# Altium PCB riglab_dynamic_scales_wifi_3ch .PcbDoc (part 3 of 3)
Units mm, origin at the board's own origin, x right, y up, seen from the top; angles counter-clockwise.
Board outline 130 x 80 mm, 4 copper layers (Top Layer, POWER, GND, Bottom Layer 1), stack 1.729 mm thick; 252 components, 202 nets, 899 pads, 104 vias.
Unrouted connection lines stored in the file: 235.
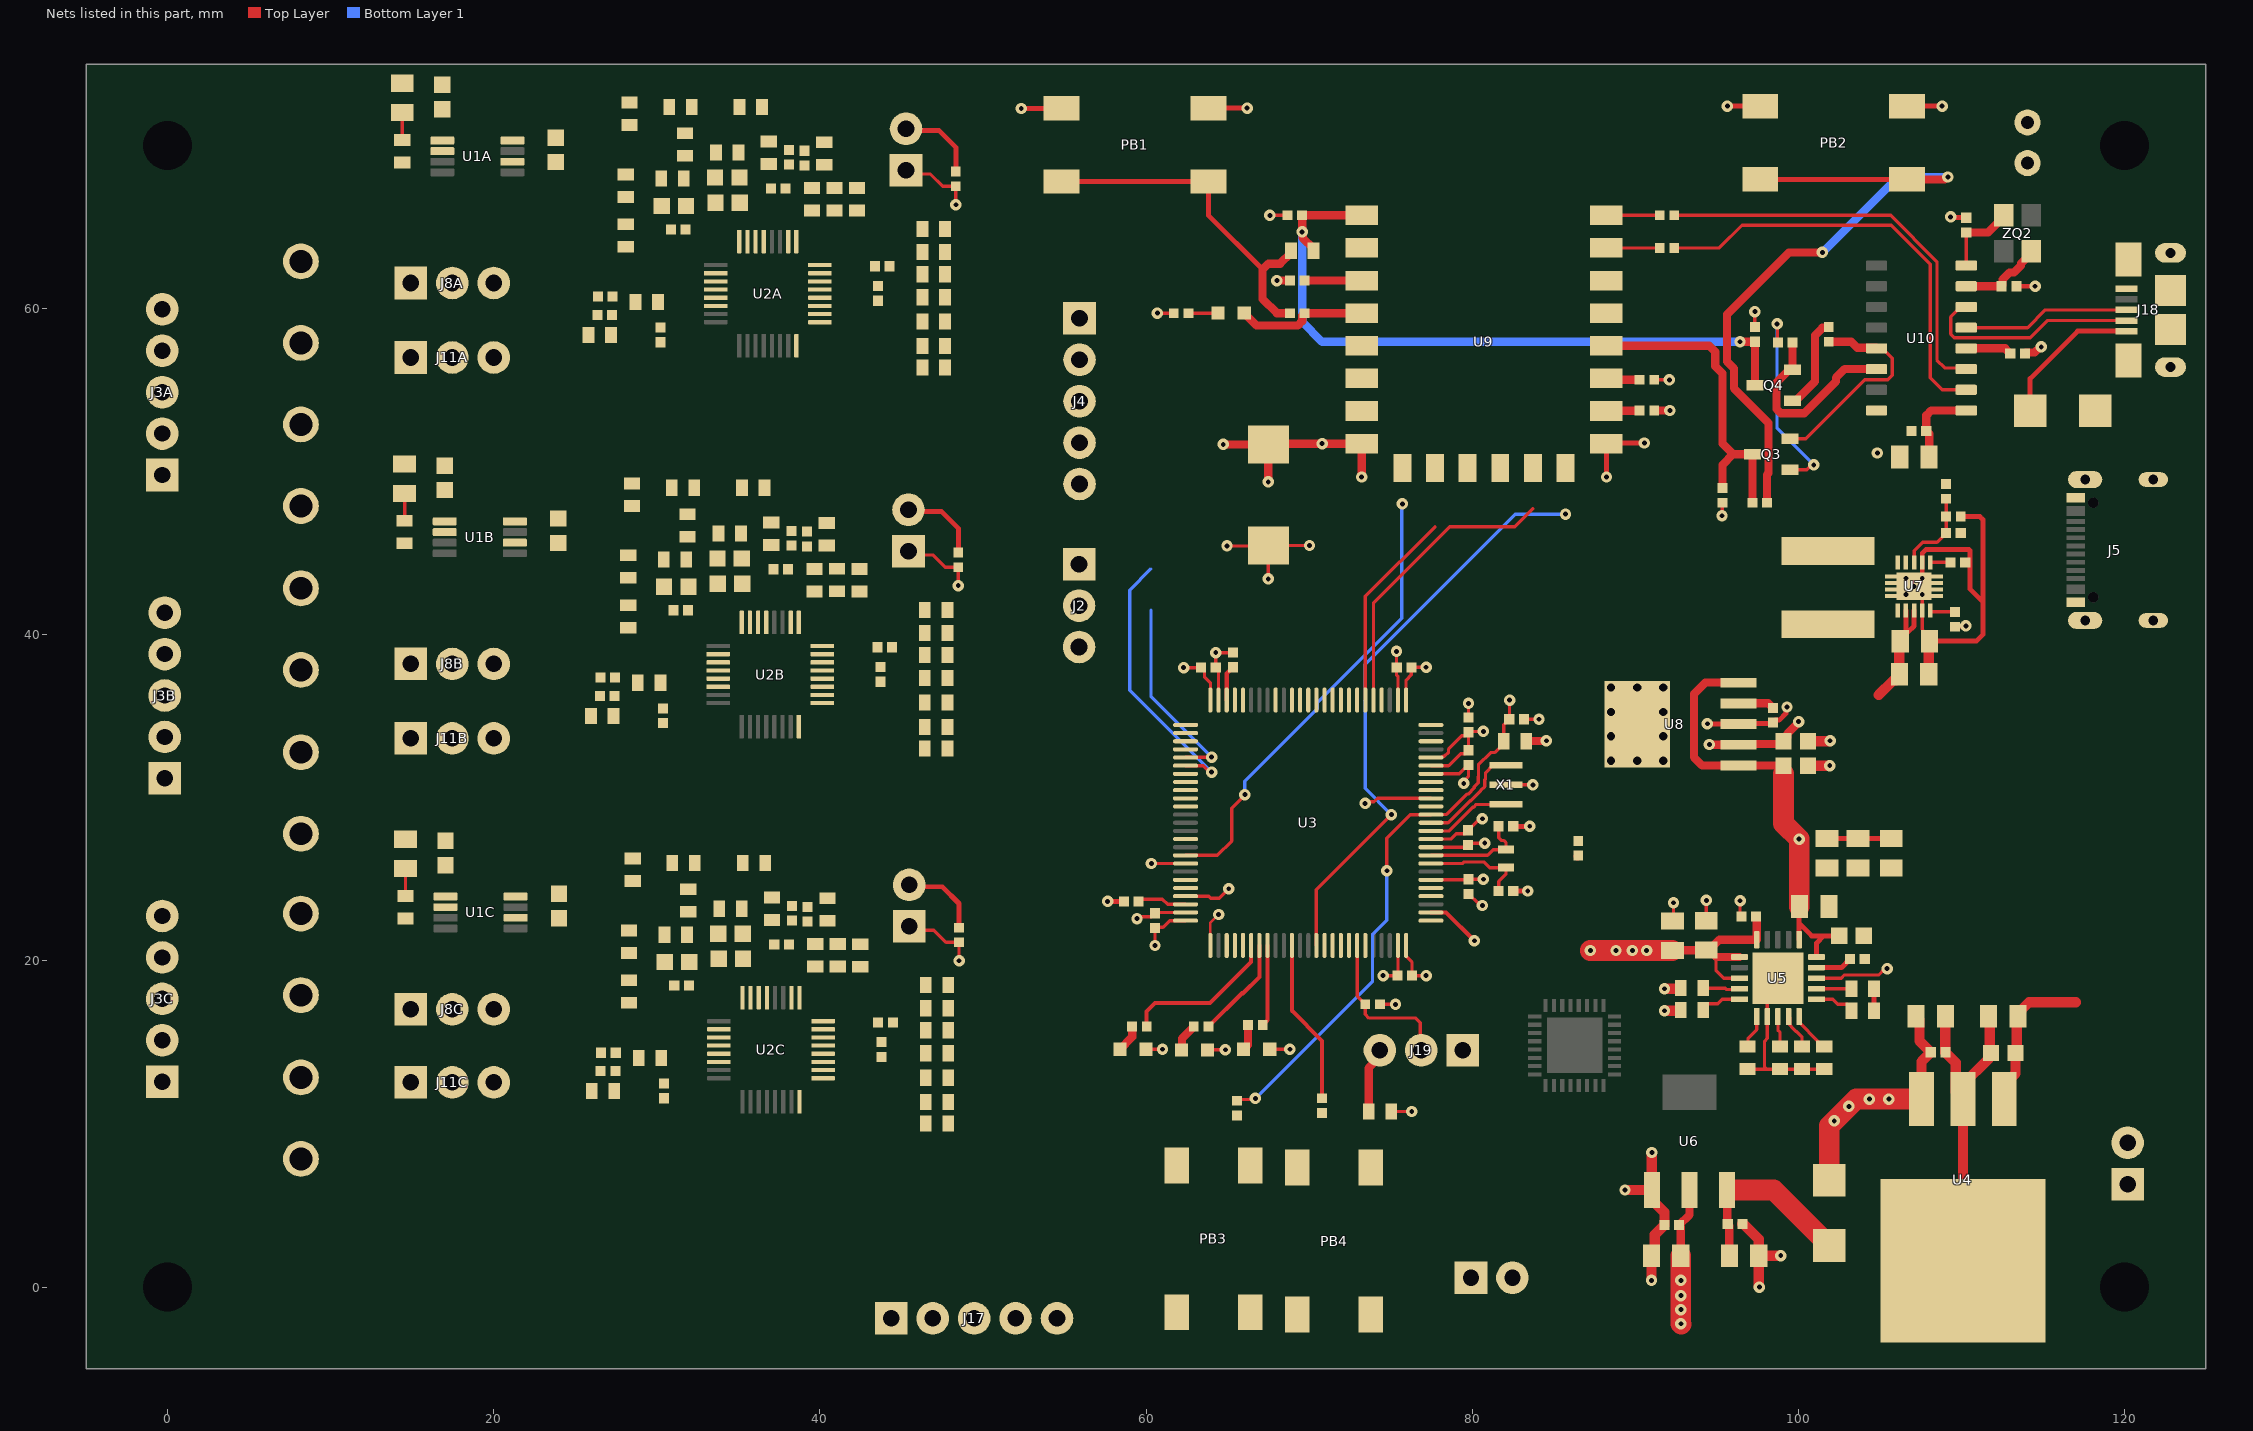
[diagram p4: the nets of this part, all layers, seen from the top]

## Part data (continued)
R1A R1B R1C R2A R2B R2C R3A R3B R3C R4A R4B R4C R5A R5B R5C R14A R14B R14C R16A R16B R16C R17A R17B R17C R32 R33 R34 R35 R36 R38 R41 R42 R46A R46B R46C R74: library part RC0603JR-070RL, "RES 0603 0 5%", Limit Voltage=50V, Manufacturer=Yageo, Temperature Coefficient=100ppm, Tolerance=5%, Total Power Dissipation=0.063W, Working Temperature Max=+155°С, Working Temperature Min=-55°С, Application Category=1, Author="Arshanitsa D.", CreateDate=28.06.2020, Datasheet URL=#https://static.chipdip.ru/lib/788/DOC004788200.pdf#, Device=0603, ID=25, Library Path 2=Resistors.SchLib, Library Ref 2=Resistor2, Library Ref 3=Resistor3, Manufacturer Part Number=RC0603JR-070RL, Material=Thick-Film, Packaging Type="Cut Tape", Part Number=RC0603JR-070RL, Price=0, Price2=0, Price3=0, Series=RC, SMD=Yes, Status=Active, Table="Resistor SMT - Постоянные", Type=Resistor
R6A R6B R6C R8A R8B R8C R9A R9B R9C R10A R10B R10C R11A R11B R11C R12A R12B R12C R13A R13B R13C R15A R15B R15C: library part RC0603JR-0724RL, "RES 0603 24 5%", Limit Voltage=75V, Manufacturer=Yageo, Temperature Coefficient=100ppm, Tolerance=5%, Total Power Dissipation=0.1W, Working Temperature Max=+155°С, Working Temperature Min=-55°С, Application Category=1, Author="Krepak V.", CreateDate=06.07.2020, Datasheet URL=#https://www.terraelectronica.ru/pdf/show?pdf_file=%252Fds%252Fpdf%252FR%252FRC0603%255B1%255D.pdf#, Device=0603, Distributor=terraelectronica, DistributorURL=#https://www.terraelectronica.ru/product/439264#, ID=40, Library Path 2=Resistors.SchLib, Library Ref 2=Resistor2, Library Ref 3=Resistor3, Manufacturer Part Number=RC0603JR-0724RL, Material=Thick-Film, Packaging Type="Cut Tape", Part Number=RC0603JR-0724RL, Price=0, Price2=0, Price3=0, Replacement=CR0603-JW-240ELF, Series=RC, SMD=Yes, Status=Active, Table="Resistor SMT - Постоянные", Type=Resistor
R19A R19B R19C: library part CRCW06033R00JNEA, "RES 0603 3 Ohm 5%", Limit Voltage=75V, Manufacturer="Vishay Dale", Supplier Part Number 1=541-3.0GTR-ND, Temperature Coefficient=100ppm, Tolerance=5%, Total Power Dissipation=0.1W, Working Temperature Max=+155°С, Working Temperature Min=-55°С, Application Category=1, Author="Krepak V.", CreateDate=21.05.2021, Datasheet URL=#https://www.vishay.com/docs/20035/dcrcwe3.pdf#, Device=0603, ID=76, Library Path 2=Resistors.SchLib, Library Ref 2=Resistor2, Library Ref 3=Resistor3, Manufacturer Part Number=CRCW06033R00JNEA, Material=Thick-Film, Packaging Type=Tape&Reel, Part Number=CRCW06033R00JNEA, Price=0, Price2=0, Price3=0, Series=CRCW, SMD=Yes, Status=Active, Supplier 1=Digikey, Table="Resistor SMT - Постоянные", Type=Resistor
R22A R22B R22C R23A R23B R23C R44A R44B R44C: library part RC0603BR-074K12L, "RES 0603 4.12k 0.1%", Limit Voltage=75V, Manufacturer=Yageo, Temperature Coefficient=100ppm, Tolerance=0.1%, Total Power Dissipation=0.1W, Working Temperature Max=+155°С, Working Temperature Min=-55°С, Application Category=1, Author="Krepak V.", CreateDate=09.04.2024, Datasheet URL=#https://www.terraelectronica.ru/pdf/show?pdf_file=https%253A%252F%252Fwww.mouser.com%252Fds%252F2%252F447%252FRC0603-1212058.pdf#, Device=0603, Distributor=terraelectronica, DistributorURL=#https://www.terraelectronica.ru/product/871213#, ID=110, Library Path 2=Resistors.SchLib, Library Ref 2=Resistor2, Library Ref 3=Resistor3, Manufacturer Part Number=RC0603BR-074K12L, Material=Thick-Film, Packaging Type="Cut Tape", Part Number=RC0603BR-074K12L, Price=0, Price2=0, Price3=0, Series=RC, SMD=Yes, Status=Active, Table="Resistor SMT - Постоянные", Type=Resistor
R26 R28: library part RC0603JR-074K7L, "RES 0603 4.7k 5%", Limit Voltage=75V, Manufacturer=Yageo, Temperature Coefficient=100ppm, Tolerance=5%, Total Power Dissipation=0.1W, Working Temperature Max=+155°С, Working Temperature Min=-55°С, Application Category=1, Author="Krepak V.", CreateDate=06.07.2020, Datasheet URL=#https://www.terraelectronica.ru/pdf/show?pdf_file=%252Fds%252Fpdf%252FR%252FRC0603%255B1%255D.pdf#, Device=0603, Distributor=terraelectronica, DistributorURL=#https://www.terraelectronica.ru/product/540975#, ID=29, Library Path 2=Resistors.SchLib, Library Ref 2=Resistor2, Library Ref 3=Resistor3, Manufacturer Part Number=RC0603JR-074K7L, Material=Thick-Film, Packaging Type="Cut Tape", Part Number=RC0603JR-074K7L, Price=0, Price2=0, Price3=0, Replacement="CR-03JL7---4K7, CRCW06034K70JNEA", Series=RC, SMD=Yes, Status=Active, Table="Resistor SMT - Постоянные", Type=Resistor
R27 R29 R30 R64 R65 R66 R68 R69 R72 R73 R75: library part RC0402FR-07499RL, "RES 0402 499 1%", Limit Voltage=50V, Manufacturer=Yageo, Supplier Part Number 1=311-499LRTR-ND, Temperature Coefficient=100ppm, Tolerance=1%, Total Power Dissipation=0.0625W, Working Temperature Max=+155°С, Working Temperature Min=-55°С, Application Category=1, Author="Krepak V.", CreateDate=01.02.2022, Datasheet URL=#https://www.yageo.com/upload/media/product/productsearch/datasheet/rchip/PYu-RC_Group_51_RoHS_L_11.pdf#, Device=0402, Distributor2="Jul. 7, 2020 V.11", ID=90, Library Path 2=Resistors.SchLib, Library Ref 2=Resistor2, Library Ref 3=Resistor3, Manufacturer Part Number=RC0402FR-07499RL, Material=Thick-Film, Packaging Type=Tape&Reel, Part Number=RC0402FR-07499RL, Price=0, Price2=0, Price3=0, Series=RC_L, SMD=Yes, Status=Active, Supplier 1=Digikey, Table="Resistor SMT - Постоянные", Type=Resistor
R31 R39: library part RC0402FR-07100KL, "RES 0402 100k 1%", Limit Voltage=50V, Manufacturer=Yageo, Temperature Coefficient=100ppm, Tolerance=1%, Total Power Dissipation=0.0625W, Working Temperature Max=+155°С, Working Temperature Min=-55°С, Application Category=1, Author="Krepak V.", CreateDate=23.02.2020, Device=0402, ID=2, Library Path 2=Resistors.SchLib, Library Ref 2=Resistor2, Library Ref 3=Resistor3, Material=Thick-Film, Packaging Type="Cut Tape", Part Number=RC0402FR-07100KL, Price=0, Price2=0, Price3=0, Series=RC, SMD=Yes, Table="Resistor SMT - Постоянные", Type=Resistor
R37: library part RC0402FR-07698KL, "RES 0402 698k 1%", Limit Voltage=50V, Manufacturer=Yageo, Temperature Coefficient=100ppm, Tolerance=1%, Total Power Dissipation=0.0625W, Working Temperature Max=+155°С, Working Temperature Min=-55°С, Application Category=1, Author="Krepak V.", CreateDate=09.04.2024, Device=0402, ID=109, Library Path 2=Resistors.SchLib, Library Ref 2=Resistor2, Library Ref 3=Resistor3, Manufacturer Part Number=RC0402FR-07698KL, Material=Thick-Film, Packaging Type="Cut Tape", Part Number=RC0402FR-07698KL, Price=0, Price2=0, Price3=0, Series=RC, SMD=Yes, Status=Active, Table="Resistor SMT - Постоянные", Type=Resistor
R40: library part RC0402FR-0769K8L, "RES 0402 69.8k 1%", Limit Voltage=75V, Manufacturer=Yageo, Temperature Coefficient=100ppm, Tolerance=1%, Total Power Dissipation=0.0625W, Working Temperature Max=+155°С, Working Temperature Min=-55°С, Application Category=1, Author="Krepak V.", CreateDate=22.02.2024, Device=0402, ID=107, Library Path 2=Resistors.SchLib, Library Ref 2=Resistor2, Library Ref 3=Resistor3, Manufacturer Part Number=RC0402FR-0769K8L, Material=Thick-Film, Packaging Type=Tape&Reel, Part Number=RC0402FR-0769K8L, Price=0, Price2=0, Price3=0, Series=0.0625W, SMD=Yes, Status=Active, Table="Resistor SMT - Постоянные", Type=Resistor
R52A R52B R52C R53A R53B R53C: library part RC0603FR-071M2L, "RES 0603 1.2M 1%", Limit Voltage=75V, Manufacturer=Yageo, Temperature Coefficient=100ppm, Tolerance=1%, Total Power Dissipation=0.1W, Working Temperature Max=+155°С, Working Temperature Min=-55°С, Application Category=1, Author="Krepak V.", CreateDate=28.03.2023, Device=0603, ID=97, Library Path 2=Resistors.SchLib, Library Ref 2=Resistor2, Library Ref 3=Resistor3, Manufacturer Part Number=RC0603FR-071M2L, Material=Thick-Film, Packaging Type="Cut Tape", Part Number=RC0603FR-071M2L, Price=0, Price2=0, Price3=0, Series=RC, SMD=Yes, Status=Active, Table="Resistor SMT - Постоянные", Type=Resistor
R54A R54B R54C: library part RC0402FR-07392KL, "RES 0402 392k 1%", Limit Voltage=50V, Manufacturer=Yageo, Supplier Part Number 1=YAG3144TR-ND, Temperature Coefficient=100ppm, Tolerance=1%, Total Power Dissipation=0.0625W, Working Temperature Max=+155°С, Working Temperature Min=-55°С, Application Category=1, Author="Krepak V.", CreateDate=24.06.2021, Datasheet URL=#https://www.yageo.com/upload/media/product/productsearch/datasheet/rchip/PYu-RC_Group_51_RoHS_L_11.pdf#, Device=0402, Distributor2="Jul. 7, 2020 V.11", ID=84, Library Path 2=Resistors.SchLib, Library Ref 2=Resistor2, Library Ref 3=Resistor3, Manufacturer Part Number=RC0402FR-07392KL, Material=Thick-Film, Packaging Type=Tape&Reel, Part Number=RC0402FR-07392KL, Price=0, Price2=0, Price3=0, Series=RC_L, SMD=Yes, Status=Active, Supplier 1=Digikey, Table="Resistor SMT - Постоянные", Type=Resistor
R60 R61 R62 R63 R67 R70 R71: library part RC0402FR-0710KL, "RES 0402 10k 1%", Limit Voltage=50V, Manufacturer=Yageo, Temperature Coefficient=100ppm, Tolerance=1%, Total Power Dissipation=0.0625W, Working Temperature Max=+155°С, Working Temperature Min=-55°С, Application Category=1, Author="Krepak V.", CreateDate=26.02.2020, Datasheet URL=#https://www.terraelectronica.ru/pdf/show?pdf_file=%252Fds%252Fpdf%252FR%252FRC0402.pdf#, Device=0402, ID=9, Library Path 2=Resistors.SchLib, Library Ref 2=Resistor2, Library Ref 3=Resistor3, Manufacturer Part Number=RC0402FR-0710KL, Material=Thick-Film, Packaging Type="Cut Tape", Part Number=RC0402FR-0710KL, Price=0, Price2=0, Price3=0, Replacement=CR-02FL6---10K, Series=RC, SMD=Yes, Table="Resistor SMT - Постоянные", Type=Resistor
U1A U1B U1C: "Series Voltage Reference IC Fixed 2.5V V ±0.1% 10 mA 8-VSSOP", Input Voltage="2.7V ~ 18V", Manufacturer="Texas Instruments", Output Current="10 mA", Output Voltage (Min/Fixed)=2.5V, Package=None, Tolerance=±0.1%, Working Temperature Max="+125°C (TA)", Working Temperature Min=-40°C, Author="Krepak V.", Availability=Unavailable, CreateDate=04.04.2024, Datasheet URL=#https://www.ti.com/lit/ds/symlink/ref5020.pdf#, Datasheet Version="SBOS410K – JUNE 2007 – REVISED JUNE 2023", Device=REF5025, ID=2, Manufacturer Part Number=REF5025AIDGKR, MP=REF5025AIDGKR, Output Type=Fixed, Packaging Type=Tape&Reel, Part Number=REF5025AIDGKR, Price=0, Price2=0, Price3=0, Status=Active, Table="IC - Разное", Type=IC
U2A U2B U2C: "24 Bit Analog to Digital Converter 12 Input 1 Sigma-Delta 32-TQFP (5x5)", Input Voltage="Analog 2.7V ~ 5.25V Digital 2.7V ~ 3.6V", Manufacturer="Texas Instruments", Package="LQFP-32 Texas Instruments", Working Temperature Max=+125°С, Working Temperature Min=-50°C, Author="Krepak V.", Availability=Unavailable, CreateDate=04.04.2024, Datasheet URL=#https://www.ti.com/lit/gpn/ADS124S08#, Datasheet Version="SBAS660C –AUGUST 2016–REVISED JUNE 2017", Device=ADS124S08IPBSR, Function=ADC, ID=11, Manufacturer Part Number=ADS124S08IPBSR, MF="Texas Instruments", MP=ADS124S08IPBSR, Packaging Type=Tape&Reel, Part Number=ADS124S08IPBSR, Price=0, Price2=0, Price3=0, SMD=Yes, SnapEDA_Link=https://www.snapeda.com/parts/ADS124S08IPBSR/Texas%20Instruments/view-part/584788/?ref=snap, Status=Active, Table="IC - Разное", Type=IC
U3: "ARM® Cortex®-M7 STM32F7 Microcontroller IC 32-Bit Single-Core 216MHz 1MB (1M x 8) FLASH 100-LQFP (14x14)", Manufacturer="ST Microelectronics", Operation Frequency=216MHz, Package="LQFP-100 STMicroelectronics", Working Temperature Max=+85°С, Working Temperature Min=-40°С, Author="Krepak V.", Availability="In Stock", Check_prices=https://www.snapeda.com/parts/STM32F765VGT6TR/STMicroelectronics/view-part/?ref=eda, CreateDate=04.04.2024, Datasheet URL=#https://www.st.com/resource/en/datasheet/stm32f765vg.pdf#, Datasheet Version="August 2023", Device=STM32F765VGT6, Flash="1MB (1M x 8)", I/O Lines=82, ID=12, Manufacturer Part Number=STM32F765VGT6, MF=STMicroelectronics, MP=STM32F765VGT6TR, Packaging Type=Tape&Reel, Part Number=STM32F765VGT6, Price=0, Price2=0, Price3=0, Prog Interface="SWD, JTAG", Purchase-URL=https://pricing.snapeda.com/search?q=STM32F765VGT6TR&ref=eda, Series=STM32F7, SMD=Yes, SnapEDA_Link=https://www.snapeda.com/parts/STM32F765VGT6TR/STMicroelectronics/view-part/?ref=snap, SRAM="512K x 8", Status=Active, Supply Operation="1.7V ~ 3.6V", Table="IC - Микроконтроллеры", Type=IC
U4: library part LM7805S/TR, "TO-263-3 Linear Voltage Regulators (LDO) ROHS", Author="Krepak V.", CreateDate=19.02.2024, Device=LM7805S, ID=44, Part Number=LM7805S/TR, Price=0, Price2=0, Price3=0, SMD=Yes, Status=Active, Table="IC - Преобразователи и модули питания", Type=IC
U5: "1-A, 36-V, low-noise, high-PSRR, low-dropout voltage regulator with enable 20-VQFN -40 to 125", Package="VQFN-20 Texas Instruments", Author="Krepak V.", Availability=Good, CreateDate=05.04.2024, Device=TPS7A4700RGWR, ID=48, MF="Texas Instruments", MP=TPS7A4700RGWR, Part Number=TPS7A4700RGWR, Price=0, Price2=0, Price3=0, Purchase-URL=https://pricing.snapeda.com/search/part/TPS7A4700RGWR/?ref=eda, SMD=Yes, SnapEDA_Link=https://www.snapeda.com/parts/TPS7A4700RGWR/Texas%20Instruments/view-part/424142/?ref=snap, Table="IC - Преобразователи и модули питания", Type=IC
U7: "Buck-boost type Adjustable 2.5V~8V 2A 2.5V~12V DFN-10(3x3) DC-DC Converters ROHS", Input Voltage="2.5 V to 12 V", Manufacturer="Texas Instruments", Operation Frequency="2.4 MHz", Working Temperature Max=+85°C, Working Temperature Min=-40°C, Author="Krepak V.", CreateDate=22.02.2024, Datasheet Version=https://www.ti.com/lit/ds/symlink/tps63060.pdf?HQS=dis-dk-null-digikeymode-dsf-pf-null-wwe&ts=1708584012537&ref_url=https%253A%252F%252Fwww.ti.com%252Fgeneral%252Fdocs%252Fsuppproductinfo.tsp%253FdistId%253D10%2526gotoUrl%253Dhttps%253A%252F%252Fwww.ti.com%252Flit%252Fgpn%252Ftps63060, Device=TPS63060DSCR, Function=Buck-Boost, ID=46, Manufacturer Part Number=TPS63060DSCR, Number of Outputs=1, Packaging Type=Tape&Reel, Part Number=TPS63060DSCR, Price=0, Price2=0, Price3=0, SMD=Yes, Status=Active, Table="IC - Преобразователи и модули питания", Topology=Buck-Boost, Type=IC
U8: "1-A, ultra-low-dropout voltage regulator with reverse current protection & enable 6-SOT-223 -40 to 125", Package=None, Author="Krepak V.", Availability=Unavailable, CreateDate=05.04.2024, Device=TPS73733DCQR, ID=49, MP=TPS73733DCQR, Part Number=TPS73733DCQR, Price=0, Price2=0, Price3=0, SMD=Yes, Table="IC - Преобразователи и модули питания", Type=IC
U9: library part ESP8266MOD, "-90dBm 16dBm ESP8266芯片 板载PCBAntenna 2.4GHz SMD,16x24mm WiFi Modules ROHS", Package=None, Working Temperature Max=+85°С, Working Temperature Min=-40°С, Author="Krepak V.", Availability="Not in stock", Check_prices=https://www.snapeda.com/parts/ESP8266-12E/ESP-12E/AI-Thinker/view-part/?ref=eda, CreateDate=04.04.2024, Device=ESP-12F(ESP8266MOD), ID=10, MF=AI-Thinker, MP=ESP8266-12E/ESP-12E, Part Number=ESP8266MOD, Price=0, Price2=0, Price3=0, RF Family/Standard=WiFi, SMD=Yes, SnapEDA_Link=https://www.snapeda.com/parts/ESP8266-12E/ESP-12E/AI-Thinker/view-part/?ref=snap, Status=Active, Table="Modules - Радиотрансиверы", Type=Misc
U10: "2Mbps Transceiver USB 2.0 SOP-16 USB ICs ROHS", Package=None, Author="Krepak V.", Availability="Not in stock", Check_prices=https://www.snapeda.com/parts/Ch340G/WCH/view-part/?ref=eda, CreateDate=05.04.2024, Device=CH340G, ID=29, MF=WCH, MP=Ch340G, Part Number=CH340G, Price=0, Price2=0, Price3=0, SMD=Yes, SnapEDA_Link=https://www.snapeda.com/parts/Ch340G/WCH/view-part/?ref=snap, Table="IC - Микросхемы интерфейсов", Type=IC
U11: "USB Controller USB 2.0, OTG ULPI Interface 32-QFN (5x5)", Manufacturer="Microchip Technology", Manufacturer_Name=Microchip, Supplier Part Number 1=638-1034-ND, Working Temperature Max=+85°С, Working Temperature Min=-40°С, Author="Krepak V.", Copyright="Copyright (C) 2025 Ultra Librarian. All rights reserved.", CreateDate=01.12.2025, Device=USB3300-EZK, ID=30, Manufacturer Part Number=USB3300-EZK, Manufacturer_Part_Number=USB3300-EZK, Part Number=USB3300-EZK, Price=0, Price2=0, Price3=0, Protocol="USB 2.0, OTG", RefDes=RefDes, SMD=Yes, Status=Active, Supplier 1=Digikey, Supply Operation="3V ~ 3.6V", Table="IC - Микросхемы интерфейсов", Type=IC
X1: "8MHz ±0.5% 33pF SMD3213-3P Ceramic Resonators ROHS", Capacitance=33pF, Case/Package=Ceramic, Frequency=8MHz, Frequency Stability=0.2%, Frequency Tolerance=0.5%, Manufacturer=Murata, Max Operating Temperature=80degC, Min Operating Temperature=-20degC, Package Description="3-Pin Surface Mount Device, Body 3.2 x 1.3 mm, Pitch 1.2 mm", Package Quantity=1, Package Reference=CSTCE_G_A-3, Temperature Coefficient=±0.5%, Working Temperature Max=+125°С, Working Temperature Min=-40°С, Author="Krepak V.", Composition=Ceramic, Contact Plating=Gold, CreateDate=21.02.2024, Datasheet URL=#https://jlcpcb.com/partdetail/MurataElectronics-CSTCE8M00G55R0/C70457#, Datasheet Version=Mar.17,2015, Device=Crystal, Height=0.031inch, ID=10, Lead Free=LeadFree, Length=0.126inch, Load Capacitance=33pF, Manufacturer Part Number=CSTCE8M00G55-R0, Manufacturer URL=http://www.murata.com/, Mount=SurfaceMount, Number of Pins=3, Output Frequency=8MHz, Packaging=TapeandReel, Packaging Type=Tape&Reel, Part Number=CSTCE8M00G55-R0, Price=0, Price2=0, Price3=0, REACH SVHC=NoSVHC, RoHSCompliant=True, Self Resonant Frequency=8MHz, SMD=Yes, Status=Active, Table="Crystal SMT - Кварцевые Резонаторы", Termination=SMD/SMT, Tolerance=0.5%, Type=Crystal, Width=0.051inch
ZQ1: library part ABS05-32.768kHz-T, "32.768kHz 12.5pF ±20ppm SMD1610-2P Crystals ROHS", Load Capacitance=12.5pF, Manufacturer=Abracon, Output Frequency=32.768kHz, Working Temperature Max=+85°С, Working Temperature Min=-40°С, Author="Krepak V.", CreateDate=21.02.2024, Datasheet URL=#https://jlcpcb.com/partdetail/AbraconLlc-ABS05_32_768kHzT/C179633#, Datasheet Version="Revised: 06.03.15", Device=Crystal, ID=9, Manufacturer Part Number=ABS05-32.768kHz-T, Packaging Type=Tape&Reel, Part Number=ABS05-32.768kHz-T, Price=0, Price2=0, Price3=0, SMD=Yes, Status=Active, Table="Crystal SMT - Кварцевые Резонаторы", Type=Crystal
ZQ2: library part "KX-7 16.0 MHz", "Кварцевый резонатор 16.0МГц в корпусе SMD. Размер 3,2х2,5х1,2, Температурный диапазон: -20/+70С Стабильность частоты +/- 30ррm.", Output Frequency=16MHz, Distributor=terraelectronica, DistributorURL=#https://www.terraelectronica.ru/product/165772#, ID=1, Part Number="KX-7 16.0 MHz", Price=0, Price2=0, Price3=0, SMD=Yes, Table="Crystal SMT - Кварцевые Резонаторы", Type=Crystal
U6: Device=AMS1117-3.3, ID=25, Part Number=AMS1117-3.3, Price=0, Price2=0, Price3=0, SMD=Yes, Table="IC - Преобразователи и модули питания", Type=IC

## Free pads (board coordinates)
  round 1.524 hole 3 unplated: 2(0,70) 2(0,0) 2(120,0) 2(120,70)

## Via types
v1: diameter 0.7, hole 0.3, Top Layer to Bottom Layer 1, tented both sides, 102 vias
v2: diameter 0.7, hole 0.3, Top Layer to Bottom Layer 1, 2 vias

## Nets (pads, with @x,y where several pads share a name; then routed paths per layer and width w, separated by ;. In a path a pad name is that pad's centre, name@x,y a point inside that pad or via, vN(x,y) a via of type N, cw(c..) or ccw(c..) an arc to the next point about the centre after c; other vN are vias at no path point)
ADC0_DRDY: R12A.2 U3.65
ADC0_nCS: R9A.1 U3.54
ADC1_DRDY: R12B.2 U3.93
ADC1_nCS: R9B.1 U3.32
ADC2_DRDY: R12C.2 U3.95
ADC2_nCS: R9C.1 U3.33
ADC_CLKA: J12A.2 R15A.1 R54A.2 | length 5
  Top Layer w0.305: J12A.2@45.284,71.03 45.399,70.915 47.314,70.915 48.339,69.89 R54A.2@48.339,68.405
ADC_CLKB: J12B.2 R15B.1 R54B.2 | length 5
  Top Layer w0.305: J12B.2@45.434,47.67 45.549,47.555 47.464,47.555 48.489,46.53 R54B.2@48.489,45.045
ADC_CLKC: J12C.2 R15C.1 R54C.2 | length 5
  Top Layer w0.305: J12C.2@45.48,24.665 45.595,24.55 47.51,24.55 48.535,23.525 R54C.2@48.535,22.04
ADC_DINA: R11A.1 R11B.1 R11C.1 U3.16 | length 4.2
  Top Layer w0.203: v1(73.44,29.664) 73.535,29.759 73.982,29.759 74.197,29.973 U3.16@77.475,29.973
ADC_DOUTA: R13A.1 R13B.1 R13C.1 U3.53
ADC_EXT_CLK_EN: U3.57
ADC_nRST: R6A.1 R6B.1 R6C.1 U3.60
ADC_SCLKA: R10A.1 R10B.1 R10C.1 U3.68 | length 2.1
  Top Layer w0.203: v1(60.333,25.973) U3.68@62.425,25.973
ADC_START_SYNC: R8A.1 R8B.1 R8C.1 U3.61
AIN8A: J3A.4 J9A.2 R22A.1 R52A.1
AIN8B: J3B.4 J9B.2 R22B.1 R52B.1
AIN8C: J3C.4 J9C.2 R22C.1 R52C.1
AIN9A: J3A.3 J10A.1 J11A.3 R23A.1 R53A.2
AIN9B: J3B.3 J10B.1 J11B.3 R23B.1 R53B.2
AIN9C: J3C.3 J10C.1 J11C.3 R23C.1 R53C.2
AVDD: C6A.2 C6B.2 C6C.2 J8A.3 J8B.3 J8C.3 R1A.1 R1B.1 R1C.1 R2A.2 R2B.2 R2C.2 R5A.2 R5B.2 R5C.2 R52A.2 R52B.2 R52C.2
AVDD_ADC: C10A.1 C10B.1 C10C.1 C68.2 C69.2 C70.2 R2A.1 R2B.1 R2C.1 U1A.2 U1B.2 U1C.2 U5.1 U5.3 U5.20 | length 16.4
  Top Layer w0.203: C69.2@94.53,20.667 94.953,20.243 94.953,19.423 95.435,18.942 U5.3@96.395,18.942
  Top Layer w0.508: C70.2@92.28,20.642 92.293,20.654 94.342,20.654 C69.2@94.355,20.667 94.53,20.667 95.165,21.302 U5.20@97.455,21.302 97.455,22.677 C68.2@97.415,22.717 ; C69.2@94.953,20.243 94.955,20.242 U5.1@96.395,20.242
  Top Layer w1.27: v1(87.25,20.642) v1(88.825,20.642) v1(89.825,20.642) v1(90.7,20.642) C70.2@92.28,20.642
BOOT0: J19.2 R31.2 U3.94 | length 9.7
  Top Layer w0.203: U3.94@72.95,20.948 72.95,17.848 R31.2@73.45,17.348 73.45,16.723 73.675,16.498 76.55,16.498 76.825,16.223 76.825,14.579 J19.2@76.885,14.519
COEF_RST: R73.2 U3.86 | length 10.1
  Top Layer w0.254: U3.86@68.95,20.948 68.95,16.949 70.8,15.099 R73.2@70.8,11.575
D_N: J18.2 U10.6 | length 13.1
  Top Layer w0.203: U10.6@110.3,60.105 109.955,60.105 109.343,59.493 109.343,58.445 109.565,58.223 114.223,58.223 115.27,59.27 J18.2@119.634,59.27
D_P: J18.3 U10.5 | length 9.8
  Top Layer w0.203: U10.5@110.3,58.835 114.06,58.835 115.145,59.92 J18.3@119.634,59.92
DBG_ESP_CLK: J4.4 U9.14
DBG_ESP_MISO: J4.3 U9.10
DBG_ESP_MOSI: J4.2 U9.13
DBG_ESP_nCS: J4.1 U9.9
DVDD_3.3V: C73.2 R1A.2 R1B.2 R1C.2 R3A.2 R3B.2 R3C.2 R4A.2 R4B.2 R4C.2 U8.2 | length 6.2
  Top Layer w0.508: v1(94.55,33.275) 94.56,33.265 96.315,33.265 U8.2@96.325,33.255 96.371,33.301 98.926,33.301 C73.2@99.1,33.475 99.346,33.721 99.346,33.944 100.025,34.623 v1(100.025,34.675)
ESP_ADC: U9.2
ESP_CS0: R67.2 U3.67 U9.16 | length 30.3
  Top Layer w0.203: U3.67@62.425,26.473 64.373,26.473 65.25,27.35 65.25,29.362 66.062,30.174 v1(66.062,30.198)
  Top Layer w0.508: U9.16@88.225,53.725 88.24,53.74 90.248,53.74 R67.2@90.263,53.755
  Bottom Layer 1 w0.203: v1(66.062,30.198) 66.062,31.01 70.515,35.463 70.515,35.837 75.685,41.007 75.685,47.985 v1(75.725,48.025)
ESP_EN: R62.2 U9.3 | length 3.4
  Top Layer w0.508: R62.2@69.875,61.725 U9.3@73.225,61.725
ESP_GPIO0: Q3.3 R60.2 R66.2 U9.18 | length 20.1
  Top Layer w0.508: U9.18@88.225,57.725 94.543,57.725 94.917,57.351 94.917,56.465 95.35,56.032 95.35,51.725 96,51.075 ; R60.2@95.35,49 95.35,50.425 96,51.075 ; R66.2@97.187,48.1 97.193,48.107 97.193,51.068 Q3.3@97.2,51.075 96,51.075
ESP_GPIO2: R61.2 U9.17 | length 2.1
  Top Layer w0.508: U9.17@88.225,55.725 88.313,55.637 R61.2@90.263,55.637
ESP_GPIO4: U9.19
ESP_GPIO5: U9.20
ESP_GPIO9: U9.11
ESP_GPIO10: U9.12
ESP_GPIO16: LD4.2 R65.1 U9.4 | length 8
  Top Layer w0.508: LD4.2@66.025,59.725 66.779,58.971 69.313,58.971 69.579,59.237 69.579,59.579 R65.1@69.725,59.725 U9.4@73.225,59.725
ESP_MISO: U3.30 U9.6 | length 18.1
  Top Layer w0.203: U3.30@73.95,35.998 73.95,41.943 78.637,46.63 82.625,46.63 83.725,47.73
ESP_MOSI: U3.31 U9.7 | length 12.4
  Top Layer w0.203: U3.31@73.45,35.998 73.45,42.355 77.725,46.63
ESP_nRST: C61.2 Q4.3 R63.2 R74.1 U9.1 | length 42.6
  Top Layer w0.508: R74.1@70.265,63.555 70.265,63.69 69.612,64.343 69.612,64.672 v1(69.575,64.709) R63.2@69.575,65.725 U9.1@73.225,65.725 ; v1(96.429,57.97) C61.2@97.35,57.97 Q4.3@97.35,55.312
  Bottom Layer 1 w0.508: v1(69.575,64.709) 69.575,59.2 70.805,57.97 v1(96.429,57.97)
ESP_RXD: R69.2 U9.21 | length 3.3
  Top Layer w0.203: U9.21@88.225,63.725 R69.2@91.5,63.725
ESP_SCLK: U3.89 U9.5 | length 35.9
  Top Layer w0.203: U3.89@70.45,20.948 70.45,24.371 v1(75.052,28.973)
  Bottom Layer 1 w0.203: v1(75.052,28.973) 73.45,30.575 73.45,38.201 82.649,47.4 v1(85.725,47.4)
ESP_TXD: R68.2 U9.22 | length 3.3
  Top Layer w0.203: U9.22@88.225,65.725 R68.2@91.5,65.725
GND: C2A.1 C2B.1 C2C.1 C3A.1 C3B.1 C3C.1 C4A.1 C4B.1 C4C.1 C5A.1 C5B.1 C5C.1 C10A.2 C10B.2 C10C.2 C11A.2 C11B.2 C11C.2 C13A.1 C13B.1 C13C.1 C17A.1 C17B.1 C17C.1 C19A.2 C19B.2 C19C.2 C25.1 C26.1 C27.1 C28.1 C29.1 C30.1 C31.1 C32.1 C33.1 C34.1 C35.1 C36.1 C37.1 C38.1 C39.1 C40.1 C41.1 C42.1 C43.1 C44.1 C45.1 C46.1 C47.1 C48.1 C49.1 C50.1 C51.1 C52.1 C53.1 C55A.1 C55B.1 C55C.1 C59A.2 C59B.2 C59C.2 C60.2 C61.1 C62.1 C63.1 C64.1 C65.1 C66.1 C67.1 C68.1 C69.1 C70.1 C71.1 C72.1 C73.1 C74.1 J1.2 J2.1 J3A.1 J3B.1 J3C.1 J4.5 J5.A1_B12 J5.B1_A12 J5.SH1 J5.SH2 J5.SH3 J5.SH4 J6.2 J11A.2 J11B.2 J11C.2 J12A.1 J12B.1 J12C.1 J17.5 J18.0 J18.5 J19.1 LD1.2 LD2.2 LD3.2 LD5.2 PB1.2 PB2.2 PB3.2 PB4.2 R14A.1 R14B.1 R14C.1 R31.1 R32.1 R33.1 R34.1 R35.1 R36.1 R38.1 R40.1 R41.1 R42.1 R53A.1 R53B.1 R53C.1 R54A.1 R54B.1 R54C.1 R67.1 U1A.4 U1B.4 U1C.4 U2A.14 U2A.27 U2A.28 U2B.14 U2B.27 U2B.28 U2C.14 U2C.27 U2C.28 U3.10 U3.19 U3.26 U3.49 U3.74 U3.99 U4.2 U4.4 U5.7 U5.21 U6.1 U7.4 U7.7 U7.11 U8.3 U8.6 U9.15 U10.1 X1.2 | length 164.6
  Top Layer w0.203: J12A.1@45.284,68.49 45.519,68.255 46.784,68.255 47.534,67.505 R54A.1@48.339,67.505 v1(48.339,66.374) ; J12B.1@45.434,45.13 45.669,44.895 46.934,44.895 47.684,44.145 R54B.1@48.489,44.145 v1(48.489,43.014) ; J12C.1@45.48,22.125 45.715,21.89 46.98,21.89 47.73,21.14 R54C.1@48.535,21.14 v1(48.535,20.009) ; v1(59.449,22.598) 59.583,22.598 59.7,22.715 60.342,22.715 C27.1@60.55,22.923 60.6,22.973 U3.74@62.425,22.973 ; LD3.2@59.999,14.583 v1(61.01,14.583) ; LD2.2@63.784,14.551 v1(64.865,14.551) ; U3.49@64.45,35.998 64.45,37.823 C25.1@64.275,37.998 v1(64.275,38.908) C35.1@65.325,38.908 ; v1(64.965,45.45) 67.475,45.45 C60.2@67.5,45.475 ; v1(67.5,43.425) C60.2@67.5,45.475 ; LD1.2@67.59,14.583 v1(68.825,14.583) ; v1(70.025,45.475) C60.2@67.5,45.475 ; R31.1@74.35,17.348 74.354,17.344 75.296,17.344 v1(75.3,17.34) ; v1(74.538,19.098) C26.1@75.412,19.098 75.45,19.137 U3.99@75.45,20.948 ; U3.26@75.95,35.998 75.95,37.213 76.275,37.538 C30.1@76.275,37.998 76.285,38.008 v1(77.175,38.008) ; U3.10@77.475,26.973 79.616,26.973 C29.1@79.754,27.112 79.866,27.223 v1(80.773,27.223) ; U3.19@77.475,31.473 79.225,31.473 C28.1@79.775,32.023 79.775,31.31 79.484,31.019 v1(79.484,30.885) ; C31.1@79.774,24.112 80.393,23.493 80.53,23.493 v1(80.625,23.397) ; C32.1@79.775,34.923 v1(79.775,35.795) ; X1.2@82.075,30.798 v1(83.725,30.798) ; C33.1@83.175,34.823 v1(84.1,34.823) ; C70.1@92.28,22.442 92.352,22.513 v1(92.352,23.567) ; C69.1@94.355,22.467 94.367,22.479 v1(94.367,23.717) ; v1(96.43,23.692) 96.43,22.802 C68.1@96.515,22.717 ; R38.1@96.877,13.367 98.054,13.367 ; v1(97.337,59.818) 97.337,58.883 C61.1@97.35,58.87 ; U5.21@98.755,18.942 98.105,18.292 U5.7@98.105,16.582 98.105,15.251 97.935,15.081 97.935,13.486 98.054,13.367 ; R34.1@101.598,13.367 R35.1@100.225,13.367 R36.1@98.882,13.367 98.054,13.367 ; U7.11@107.604,42.47 U7.4@107.604,41.495 107.604,40.326 107.634,40.296 107.634,40.207 108.022,39.82 108.104,39.82 C49.1@108.104,39.609
  Top Layer w0.305: v1(52.35,72.275) 54.8,72.275 PB1.2@54.825,72.3 ; v1(57.65,23.652) C34.1@58.65,23.652 ; PB1.2@63.825,72.3 v1(66.204,72.3) ; C37.1@82.525,24.29 v1(83.413,24.29) ; C36.1@82.525,28.258 v1(83.535,28.258) ; v1(88.24,49.675) 88.24,51.71 U9.15@88.225,51.725 88.26,51.76 v1(90.563,51.76) ; v1(94.425,34.548) 94.437,34.537 96.313,34.537 U8.3@96.325,34.525 96.369,34.569 98.406,34.569 C74.1@98.45,34.613 98.608,34.77 98.826,34.77 99.234,35.179 99.234,35.499 v1(99.31,35.575) ; v1(95.65,72.425) PB2.2@97.667,72.425 ; R33.1@104.645,16.942 R32.1@104.645,18.292 ; PB2.2@106.667,72.425 v1(108.825,72.425) ; U7.11@107.604,43.47 U7.7@107.604,44.445 107.604,45.008 107.818,45.222 110.457,45.222 110.518,45.161 110.518,42.82 111.318,42.02 ; C49.1@108.104,39.609 110.921,39.609 111.318,40.006 111.318,42.02 ; v1(109.343,65.625) 109.368,65.6 110.275,65.6 C65.1@110.3,65.575 ; R40.1@109.966,47.25 111.139,47.25 111.318,47.071 111.318,42.02 ; C66.1@113.375,61.375 v1(114.525,61.375)
  Top Layer w0.508: R67.1@91.163,53.755 v1(92.125,53.755) ; C63.1@108.025,50.91 108.025,52.325 C62.1@107.85,52.5 107.85,53.457 108.148,53.755 U10.1@110.3,53.755 ; C64.1@113.9,57.255 113.956,57.311 114.501,57.311 114.848,57.658 v1(114.9,57.658)
  Top Layer w0.635: v1(89.375,5.95) U6.1@91.025,5.95 ; v1(90.998,0.41) C45.1@90.998,1.925 91.205,2.133 91.205,3.21 C44.1@91.795,3.8 91.795,4.58 91.025,5.35 U6.1@91.025,5.95 ; v1(91.025,8.25) U6.1@91.025,5.95 ; v1(91.795,16.942) 91.807,16.954 92.763,16.954 R41.1@92.79,16.982 ; v1(91.795,18.292) 91.807,18.304 92.764,18.304 R42.1@92.79,18.33 ; C43.1@96.575,3.866 96.644,3.866 97.575,2.935 C42.1@97.575,1.925 ; v1(97.613,0) 97.613,0.018 97.575,0.055 C42.1@97.575,1.925 ; v1(98.925,1.925) C42.1@97.575,1.925 ; C73.1@100.6,33.475 101.907,33.475 101.932,33.5 v1(101.95,33.5) ; C72.1@100.6,31.975 v1(101.932,31.973) ; C50.1@108.004,37.58 C49.1@108.004,39.69 ; C41.1@109.025,16.609 C40.1@109.025,14.4 109.662,13.763 109.662,11.967 U4.2@110.1,11.529 ; U4.4@110.1,1.625 U4.2@110.1,11.529 ; C38.1@111.675,16.61 111.75,16.535 111.75,14.425 C39.1@111.825,14.35 111.642,14.167 111.642,13.966 110.1,12.423 U4.2@110.1,11.529
LED1: R27.1 U3.83 | length 5
  Top Layer w0.254: R27.1@67.156,16.069 67.45,16.363 U3.83@67.45,20.948
LED2: R29.1 U3.82 | length 6.3
  Top Layer w0.254: R29.1@63.834,15.976 65.877,18.018 65.958,18.018 66.95,19.01 U3.82@66.95,20.948
LED3: R30.1 U3.81 | length 9.6
  Top Layer w0.254: R30.1@60.049,15.976 60.04,15.985 60.04,16.898 60.555,17.414 63.928,17.414 66.45,19.935 U3.81@66.45,20.948
LED_OUT: R75.1 U3.2 | length 3.4
  Top Layer w0.254: U3.2@77.475,22.973 77.477,22.971 78.402,22.971 v1(80.136,21.237) ; R75.1@86.498,27.37 R75.1@86.509,27.359
NetC1A_1: C1A.1 C6A.1 R14A.2 R16A.2 U2A.24 | length 0.2
  Top Layer w0.305: R16A.2@36.448,72.375 R16A.2@36.575,72.502
NetC1A_2: C1A.2 U2A.23
NetC1B_1: C1B.1 C6B.1 R14B.2 R16B.2 U2B.24 | length 0.2
  Top Layer w0.305: R16B.2@36.598,49.015 R16B.2@36.725,49.142
NetC1B_2: C1B.2 U2B.23
NetC1C_1: C1C.1 C6C.1 R14C.2 R16C.2 U2C.24 | length 0.2
  Top Layer w0.305: R16C.2@36.643,26.01 R16C.2@36.77,26.137
NetC1C_2: C1C.2 U2C.23
NetC2A_2: C2A.2 R3A.1 U2A.15
NetC2B_2: C2B.2 R3B.1 U2B.15
NetC2C_2: C2C.2 R3C.1 U2C.15
NetC3A_2: C3A.2 R4A.1 U2A.16
NetC3B_2: C3B.2 R4B.1 U2B.16
NetC3C_2: C3C.2 R4C.1 U2C.16
NetC4A_2: C4A.2 C5A.2 R5A.1 U2A.26
NetC4B_2: C4B.2 C5B.2 R5B.1 U2B.26
NetC4C_2: C4C.2 C5C.2 R5C.1 U2C.26
NetC11A_1: C11A.1 U1A.5
NetC11B_1: C11B.1 U1B.5
NetC11C_1: C11C.1 U1C.5
NetC13A_2: C13A.2 R19A.1 | length 1.7
  Top Layer w0.203: R19A.1@14.387,70.351 C13A.2@14.387,72.026
NetC13B_2: C13B.2 R19B.1 | length 1.7
  Top Layer w0.203: R19B.1@14.537,46.991 C13B.2@14.537,48.666
NetC13C_2: C13C.2 R19C.1 | length 1.7
  Top Layer w0.203: R19C.1@14.583,23.986 C13C.2@14.583,25.661
NetC17A_2: C17A.2 C18A.2 R22A.2 U2A.22
NetC17B_2: C17B.2 C18B.2 R22B.2 U2B.22
NetC17C_2: C17C.2 C18C.2 R22C.2 U2C.22
NetC18A_1: C18A.1 C19A.1 R23A.2 U2A.21
NetC18B_1: C18B.1 C19B.1 R23B.2 U2B.21
NetC18C_1: C18C.1 C19C.1 R23C.2 U2C.21
NetC34_2: C34.2 U3.73 | length 3.1
  Top Layer w0.203: C34.2@59.55,23.652 59.688,23.79 61.01,23.79 61.326,23.473 U3.73@62.425,23.473
NetC35_2: C35.2 U3.48 | length 2.2
  Top Layer w0.254: U3.48@64.95,35.998 64.95,37.633 C35.2@65.325,38.008
NetC36_2: C36.2 U3.9 ZQ1.2 | length 6.5
  Top Layer w0.203: U3.9@77.475,26.473 80.945,26.473 81.295,26.823 ZQ1.2@82.075,26.823 82.075,27.266 81.956,27.385 81.802,27.385 81.625,27.562 C36.2@81.625,28.258
NetC37_2: C37.2 U3.8 ZQ1.1 | length 6.4
  Top Layer w0.203: U3.8@77.475,25.973 79.396,25.973 79.484,26.062 80.743,26.062 81.081,25.723 ZQ1.1@82.075,25.723 82.075,25.323 81.625,24.873 C37.2@81.625,24.29
NetC42_2: C42.2 C43.2 D3.2 U6.3 | length 11.7
  Top Layer w0.254: U6.3@95.65,5.925 95.675,5.95 96.125,5.95
  Top Layer w0.508: U6.3@95.65,5.925 95.65,3.891 C43.2@95.675,3.866 95.775,3.766 C42.2@95.775,1.925
  Top Layer w1.27: 96.125,5.95 98.5,5.95 D3.2@101.9,2.55
NetC51_2: C51.2 U7.6 | length 1.3
  Top Layer w0.203: U7.6@108.142,44.395 108.104,44.433 U7.6@108.104,44.445 C51.2@109.344,44.445
NetC52_2: C52.2 R37.1 R40.2 U7.8 | length 5.3
  Top Layer w0.203: U7.8@107.104,44.445 107.119,44.46 107.119,45.165 107.63,45.676 108.509,45.676 C52.2@108.984,46.151 ; R37.1@109.066,48.35 R40.2@109.066,47.25 C52.2@109.066,46.315 ; C52.2@109.066,46.315 C52.2@109.066,46.233 108.984,46.233 C52.2@109.066,46.315
NetC55A_2: C55A.2 C57A.2 R44A.2 U2A.30
NetC55B_2: C55B.2 C57B.2 R44B.2 U2B.30
NetC55C_2: C55C.2 C57C.2 R44C.2 U2C.30
NetC57A_1: C57A.1 C59A.1 R46A.2 U2A.29
NetC57B_1: C57B.1 C59B.1 R46B.2 U2B.29
NetC57C_1: C57C.1 C59C.1 R46C.2 U2C.29
NetC64_2: C64.2 U10.4 | length 2.8
  Top Layer w0.508: U10.4@110.3,57.565 112.69,57.565 C64.2@113,57.255
NetC65_2: C65.2 U10.8 ZQ2.1 | length 4.8
  Top Layer w0.203: U10.8@110.3,62.645 C65.2@110.3,64.675
  Top Layer w0.508: C65.2@110.3,64.675 111.65,64.675 112.6,65.625 ZQ2.1@112.6,65.725
NetC66_2: C66.2 U10.7 ZQ2.3 | length 5.2
  Top Layer w0.508: U10.7@110.3,61.375 C66.2@112.475,61.375 112.531,61.431 112.531,61.793 112.953,62.215 113.232,62.215 113.654,62.637 113.654,62.781 113.952,63.079 113.954,63.079 114.3,63.425 ZQ2.3@114.3,63.525
NetC71_2: C71.2 U5.14 | length 2.3
  Top Layer w0.305: U5.14@101.115,19.592 102.653,19.592 C71.2@103.175,20.114
NetC74_2: C74.2 U8.4 | length 2.2
  Top Layer w0.508: U8.4@96.325,35.795 98.168,35.795 C74.2@98.45,35.513
NetJ19_3: J19.3 R28.1 | length 4
  Top Layer w0.508: R28.1@73.655,10.769 73.655,13.425 74.345,14.115 J19.3@74.345,14.519
NetL1_1: L1.1 U7.1
NetL1_2: L1.2 U7.10
NetLD1_1: LD1.1 R27.2 | length 1.6
  Top Layer w0.508: LD1.1@65.99,14.583 66.256,14.849 R27.2@66.256,16.069
NetLD2_1: LD2.1 R29.2 | length 1.7
  Top Layer w0.508: LD2.1@62.184,14.551 62.203,14.57 62.203,15.245 R29.2@62.934,15.976
NetLD3_1: LD3.1 R30.2 | length 1.7
  Top Layer w0.508: LD3.1@58.399,14.583 59.149,15.333 R30.2@59.149,15.976
NetLD4_1: LD4.1 R64.1 | length 1.8
  Top Layer w0.203: R64.1@62.605,59.725 LD4.1@64.425,59.725
NetLD5_1: LD5.1 R75.2 | length 0.3
  Top Layer w0.508: R75.2@86.463,26.413 R75.2@86.509,26.459 ; LD5.1@113.884,68.749 LD5.1@114.06,68.925
NetPB1_1: PB1.1 R65.2 R74.2 | length 21.9
  Top Layer w0.305: PB1.1@54.825,67.8 PB1.1@63.825,67.8 63.825,65.725 67.15,62.4
  Top Layer w0.508: R65.2@68.825,59.725 68.025,59.725 67.15,60.6 67.15,62.4 67.509,62.759 68.225,62.759 68.885,63.42 R74.2@68.885,63.555
NetPB2_1: PB2.1 R66.1 | length 41.3
  Top Layer w0.305: PB2.1@97.667,67.925 PB2.1@106.667,67.925
  Top Layer w0.508: R66.1@98.087,48.1 98.087,49.821 98.179,49.913 98.179,52.991 96.058,55.112 96.058,56.325 95.625,56.758 95.625,59.657 99.418,63.45 v1(101.479,63.45) ; PB2.1@106.667,67.925 108.973,67.925 109.123,68.075 v1(109.175,68.075)
  Bottom Layer 1 w0.508: v1(101.479,63.45) 106.104,68.075 v1(109.175,68.075)
NetPB3_1: PB3.1 R72.1
NetPB4_1: PB4.1 R73.1
NetQ3_1: Q3.1 R70.2 | length 12.3
  Top Layer w0.203: v1(98.7,59.07) 98.725,59.045 98.725,57.958 R70.2@98.75,57.933 ; Q3.1@99.5,50.125 100.515,50.125 100.815,50.425 v1(100.95,50.425)
  Bottom Layer 1 w0.203: v1(98.7,59.07) 98.7,52.675 v1(100.95,50.425)
NetQ3_2: Q3.2 R71.1 U10.13 | length 13.2
  Top Layer w0.203: Q3.2@99.5,52.025 100.454,52.025 104.065,55.637 105.488,55.637 105.757,55.905 105.757,56.953 105.145,57.565 U10.13@104.8,57.565
  Top Layer w0.508: R71.1@101.867,57.97 103.255,57.97 103.625,57.6 104.765,57.6 U10.13@104.8,57.565
NetQ4_1: Q4.1 R71.2 | length 5.7
  Top Layer w0.508: Q4.1@99.65,54.362 99.85,54.362 101.025,55.537 101.025,58.37 101.479,58.824 101.821,58.824 R71.2@101.867,58.87
NetQ4_2: Q4.2 R70.1 U10.14 | length 12.1
  Top Layer w0.508: R70.1@99.65,57.933 Q4.2@99.65,56.262 99.45,56.262 98.671,55.483 98.671,53.849 98.937,53.583 100.363,53.583 102.317,55.537 102.317,55.765 102.847,56.295 U10.14@104.8,56.295
NetR6A_2: R6A.2 U2A.18
NetR6B_2: R6B.2 U2B.18
NetR6C_2: R6C.2 U2C.18
NetR8A_2: R8A.2 U2A.8
NetR8B_2: R8B.2 U2B.8
NetR8C_2: R8C.2 U2C.8
NetR9A_2: R9A.2 U2A.9
NetR9B_2: R9B.2 U2B.9
NetR9C_2: R9C.2 U2C.9
NetR10A_2: R10A.2 U2A.11
NetR10B_2: R10B.2 U2B.11
NetR10C_2: R10C.2 U2C.11
NetR11A_2: R11A.2 U2A.10
NetR11B_2: R11B.2 U2B.10
NetR11C_2: R11C.2 U2C.10
NetR12A_1: R12A.1 U2A.13
NetR12B_1: R12B.1 U2B.13
NetR12C_1: R12C.1 U2C.13
NetR13A_2: R13A.2 U2A.12
NetR13B_2: R13B.2 U2B.12
NetR13C_2: R13C.2 U2C.12
NetR15A_2: R15A.2 U2A.17
NetR15B_2: R15B.2 U2B.17
NetR15C_2: R15C.2 U2C.17
NetR17A_1: R17A.1 R19A.2 U1A.6
NetR17B_1: R17B.1 R19B.2 U1B.6
NetR17C_1: R17C.1 R19C.2 U1C.6
NetR32_2: R32.2 U5.12 | length 2.1
  Top Layer w0.203: U5.12@101.115,18.292 R32.2@103.265,18.292
NetR33_2: R33.2 U5.11 | length 2.5
  Top Layer w0.203: U5.11@101.115,17.642 102.119,17.642 102.426,17.335 103.007,17.335 103.265,17.077 R33.2@103.265,16.942
NetR34_2: R34.2 U5.10 | length 2.6
  Top Layer w0.203: U5.10@100.055,16.582 100.055,16.227 101.204,15.078 101.204,15.005 101.463,14.747 R34.2@101.598,14.747
NetR35_2: R35.2 U5.9 | length 2.2
  Top Layer w0.203: U5.9@99.405,16.582 99.473,16.513 99.473,16.093 99.583,15.983 99.583,15.957 99.891,15.649 99.918,15.649 100.225,15.342 R35.2@100.225,14.747
NetR36_2: R36.2 U5.8 | length 1.9
  Top Layer w0.203: U5.8@98.755,16.582 98.755,15.742 98.882,15.614 R36.2@98.882,14.747
NetR38_2: R38.2 U5.6 | length 2.1
  Top Layer w0.203: R38.2@96.877,14.747 96.92,14.789 96.92,15.257 97.455,15.792 U5.6@97.455,16.582
NetR39_1: R39.1 U7.5 | length 1.6
  Top Layer w0.203: U7.5@108.104,41.495 108.104,41.445 108.142,41.406 R39.1@109.618,41.406
NetR41_2: R41.2 U5.5 | length 2.6
  Top Layer w0.203: R41.2@94.17,16.982 94.17,17.117 94.428,17.375 95.067,17.375 95.333,17.642 U5.5@96.395,17.642
NetR42_2: R42.2 U5.4 | length 2.3
  Top Layer w0.203: R42.2@94.17,18.33 95.522,18.33 95.605,18.247 96.35,18.247 U5.4@96.395,18.292
NetR68_1: R68.1 U10.3 | length 25.3
  Top Layer w0.203: R68.1@92.4,65.725 105.669,65.725 108.503,62.891 108.503,56.849 108.987,56.366 110.229,56.366 U10.3@110.3,56.295
NetR69_1: R69.1 U10.2 | length 26.7
  Top Layer w0.203: R69.1@92.4,63.725 95.15,63.725 96.55,65.125 105.699,65.125 108.1,62.724 108.1,55.75 108.825,55.025 U10.2@110.3,55.025
NetU3_12: U3.12 X1.3 | length 5.3
  Top Layer w0.203: U3.12@77.475,27.973 78.592,27.973 80.045,29.427 80.088,29.427 80.26,29.598 X1.3@82.075,29.598
NetU3_13: U3.13 X1.1 | length 6.5
  Top Layer w0.203: U3.13@77.475,28.473 78.522,28.473 79.878,29.83 79.921,29.83 80.539,30.448 80.539,30.459 80.773,30.693 80.773,31.123 80.825,31.175 80.825,31.548 81.275,31.998 X1.1@82.075,31.998
NRST: C33.2 J17.1 R26.1 R72.2 U3.14 | length 33.6
  Top Layer w0.203: R72.2@65.583,11.425 65.658,11.5 66.631,11.5 v1(66.706,11.575) ; v1(74.77,25.529) 74.77,27.538 76.205,28.973 U3.14@77.475,28.973 77.484,28.982 78.434,28.982 79.685,30.233 79.754,30.233 80.136,30.615 80.136,30.684 80.37,30.919 80.37,31.29 80.387,31.307 80.387,32.035 81.128,32.777 81.373,32.777 81.935,33.338 R26.1@81.935,33.473 81.935,34.483 C33.2@82.275,34.823 82.295,34.843 v1(82.295,35.998)
  Bottom Layer 1 w0.203: v1(66.706,11.575) 66.738,11.575 73.887,18.723 73.887,21.617 74.77,22.5 v1(74.77,25.529)
QUAD_SPI_BK1_IO0: U3.58
QUAD_SPI_BK1_IO1: U3.59
QUAD_SPI_BK1_IO2: U3.1
QUAD_SPI_BK1_IO3: U3.23
QUAD_SPI_BK1_NCS: U3.92
QUAD_SPI_BK2_IO0: U3.37
QUAD_SPI_BK2_IO1: U3.38
QUAD_SPI_BK2_IO2: U3.39
QUAD_SPI_BK2_IO3: U3.40
QUAD_SPI_BK2_NCS: U3.79
QUAD_SPI_CLK: U3.36
REFN0A: J3A.2 J10A.2 J11A.1 R46A.1
REFN0B: J3B.2 J10B.2 J11B.1 R46B.1
REFN0C: J3C.2 J10C.2 J11C.1 R46C.1
REFP0A: J3A.5 J8A.2 J9A.1 R44A.1
REFP0B: J3B.5 J8B.2 J9B.1 R44B.1
REFP0C: J3C.5 J8C.2 J9C.1 R44C.1
SPI3_MISO: U3.90
SPI3_MOSI: U3.80
SPI3_SCK: U3.78
SPI4_MISO: U3.4
SPI4_MOSI: U3.5
SPI4_SCK: U3.42
STM_RX: J2.2 U3.56 | length 16.8
  Top Layer w0.203: U3.56@62.425,31.973 63.505,31.973 63.901,31.577 v2(64.025,31.577)
  Bottom Layer 1 w0.203: 60.303,44.038 59.002,42.736 59.002,36.601 v2(64.025,31.577)
STM_TX: J2.3 U3.55 | length 12.2
  Top Layer w0.203: U3.55@62.425,32.473 62.434,32.482 64.007,32.482 v2(64.025,32.5)
  Bottom Layer 1 w0.203: 60.303,41.498 60.303,36.222 v2(64.025,32.5)
SWCLK: J17.4 U3.76 | length 2.1
  Top Layer w0.152: U3.76@63.95,20.948 63.95,22.348 v1(64.45,22.848)
SWDIO: J17.3 U3.72 | length 2.9
  Top Layer w0.203: U3.72@62.425,23.973 63.839,23.973 63.964,23.848 64.498,23.848 v1(65.075,24.425)
USB_OTG_FS_DM: U3.70
USB_OTG_FS_DP: U3.71
USB_OTG_HS_ULPI_CK: U3.29
USB_OTG_HS_ULPI_D0: U3.25
USB_OTG_HS_ULPI_D1: U3.34
USB_OTG_HS_ULPI_D2: U3.35
USB_OTG_HS_ULPI_D3: U3.46
USB_OTG_HS_ULPI_D4: U3.47
USB_OTG_HS_ULPI_D5: U3.51
USB_OTG_HS_ULPI_D6: U3.52
USB_OTG_HS_ULPI_D7: U3.91
USB_OTG_HS_ULPI_DIR: U3.17
USB_OTG_HS_ULPI_NXT: U3.18
USB_OTG_HS_ULPI_STP: U3.15
VBAT: C38.2 C39.2 C49.2 C50.2 J1.1 J6.1 U4.1 U7.2 U7.3 | length 17
  Top Layer w0.305: C49.2@106.257,39.609 106.257,39.78 106.63,40.153 106.712,40.153 107.104,40.545 U7.3@107.104,41.495 ; C49.2@106.604,40.153 U7.2@106.604,41.495
  Top Layer w0.635: 104.936,36.313 105.821,37.198 105.996,37.198 106.204,37.405 C50.2@106.204,37.58 C49.2@106.204,39.609 ; U4.1@112.64,11.529 112.64,12.423 113.325,13.108 C39.2@113.325,14.35 113.4,14.425 113.4,16.71 114.15,17.46 117.012,17.46
VBUS: D4.1 J18.1 | length 8.5
  Top Layer w0.305: D4.1@114.225,53.75 114.225,55.708 117.137,58.62 J18.1@119.593,58.62
VCC3V3: C25.2 C26.2 C27.2 C28.2 C29.2 C30.2 C31.2 C32.2 C44.2 C45.2 C60.1 J17.2 R26.2 R28.2 R60.1 R61.1 R62.1 R63.1 R64.2 U3.6 U3.11 U3.20 U3.21 U3.27 U3.50 U3.75 U3.100 U6.2 U9.8 | length 55.5
  Top Layer w0.203: v1(60.55,20.948) C27.2@60.55,22.023 60.594,22.068 61.046,22.068 61.452,22.473 U3.75@62.425,22.473 ; v1(60.7,59.725) R64.2@61.705,59.725 ; v1(62.305,37.985) 63.362,37.985 C25.2@63.375,37.998 63.583,37.79 63.583,37.425 63.95,37.058 U3.50@63.95,35.998 ; v1(67.6,65.725) R63.1@68.675,65.725 ; R28.2@75.035,10.769 v1(76.3,10.769) ; v1(75.362,38.983) 75.362,38.012 C30.2@75.375,37.998 75.362,37.985 75.362,37.538 75.45,37.45 U3.27@75.45,35.998 ; U3.100@75.95,20.948 75.95,20.298 76.312,19.937 C26.2@76.312,19.098 v1(77.175,19.098) ; U3.6@77.475,24.973 79.736,24.973 C31.2@79.774,25.012 v1(80.694,25.012) ; U3.11@77.475,27.473 78.681,27.473 79.011,27.803 79.546,27.803 C29.2@79.754,28.012 80.366,28.623 80.53,28.623 v1(80.625,28.718) ; U3.20@77.475,31.973 78.555,31.973 79.296,32.715 79.567,32.715 C28.2@79.775,32.923 C32.2@79.775,34.023 ; U3.21@77.475,32.473 78.138,32.473 78.211,32.547 78.302,32.547 78.552,32.797 78.552,33 79.367,33.815 79.567,33.815 C32.2@79.751,34 ; C32.2@79.775,34.023 79.827,34.075 v1(80.694,34.075) ; R61.1@91.163,55.637 v1(92.1,55.637) ; v1(95.325,47.3) 95.338,47.312 95.338,48.087 R60.1@95.35,48.1
  Top Layer w0.508: v1(64.735,51.675) C60.1@67.5,51.675 ; v1(67.5,49.375) C60.1@67.5,51.675 ; v1(68.025,61.725) R62.1@68.825,61.725 ; v1(73.225,49.675) U9.8@73.225,51.725 v1(70.805,51.725) 67.55,51.725 C60.1@67.5,51.675 ; R26.2@83.315,33.473 83.328,33.487 84.537,33.487 v1(84.55,33.5) ; C45.2@92.798,1.925 92.798,3.697 C44.2@92.695,3.8 93.325,4.43 U6.2@93.325,5.95
  Top Layer w1.27: C45.2@92.798,1.925 v1(92.798,0.41) v1(92.798,-0.528) v1(92.798,-1.388) v1(92.798,-2.248) v1@92.825,-2.275
VCC5V0: C40.2 C41.2 C62.2 C63.2 D3.1 D4.2 U4.3 U10.16 | length 15.4
  Top Layer w0.635: C41.2@107.225,16.609 107.433,16.402 107.433,15.092 C40.2@108.125,14.4 107.56,13.835 U4.3@107.56,11.529
  Top Layer w1.27: D3.1@101.9,6.55 101.9,9.879 v1(102.208,10.187) v1(103.1,11.079) 103.55,11.529 v1(104.358,11.529) v1(105.555,11.529) U4.3@107.56,11.529
  other v1: 104.85,51.15
VCC5V5_REG: C46.2 C47.2 C48.2 C53.2 C67.2 C72.2 R37.2 R39.2 U5.13 U5.15 U5.16 U7.9 U8.1 U8.5 | length 36.6
  Top Layer w0.203: U5.13@101.115,18.942 102.633,18.942 102.829,19.138 104.928,19.138 105.316,19.525 v1(105.45,19.525)
  Top Layer w0.305: U5.16@100.055,21.302 100.055,22.309 ; C53.2@100.055,23.317 100.055,22.309 ; U5.15@101.115,20.242 101.115,21.086 101.57,21.542 ; C48.2@101.759,27.509 C47.2@103.658,27.509 C46.2@105.7,27.509 ; C67.2@102.517,21.542 101.57,21.542 ; R39.2@109.618,40.5 109.643,40.525 110.254,40.525 v1(110.279,40.55) ; 100.055,22.309 100.823,21.542 101.57,21.542
  Top Layer w0.508: U8.5@96.325,37.065 96.315,37.075 94.3,37.075 93.603,36.378 93.603,32.487 94.105,31.985 U8.1@96.325,31.985 96.33,31.98 C72.2@99.095,31.98
  Top Layer w1.27: 99.1,31.475 99.1,28.428 v1(100.055,27.473) C53.2@100.055,23.317
VREF: J8A.1 J8B.1 J8C.1 R16A.1 R16B.1 R16C.1 R17A.2 R17B.2 R17C.2
pads on no net: J5. J5.A4_B9 J5.A5 J5.A6 J5.A7 J5.A8 J5.B4_A9 J5.B5 J5.B6 J5.B7 J5.B8 J18.4 U1A.1 U1A.3 U1A.7 U1A.8 U1B.1 U1B.3 U1B.7 U1B.8 U1C.1 U1C.3 U1C.7 U1C.8 U2A.1 U2A.2 U2A.3 U2A.4 U2A.5 U2A.6 U2A.7 U2A.19 U2A.20 U2A.25 U2A.31 U2A.32 U2B.1 U2B.2 U2B.3 U2B.4 U2B.5 U2B.6 U2B.7 U2B.19 U2B.20 U2B.25 U2B.31 U2B.32 U2C.1 U2C.2 U2C.3 U2C.4 U2C.5 U2C.6 U2C.7 U2C.19 U2C.20 U2C.25 U2C.31 U2C.32 U3.3 U3.7 U3.22 U3.24 U3.28 U3.41 U3.43 U3.44 U3.45 U3.62 U3.63 U3.64 U3.66 U3.69 U3.77 U3.84 U3.85 U3.87 U3.88 U3.96 U3.97 U3.98 U5.2 U5.17 U5.18 U5.19 U6.4 U10.9 U10.10 U10.11 U10.12 U10.15 U11.1 U11.2 U11.3 U11.4 U11.5 U11.6 U11.7 U11.8 U11.9 U11.10 U11.11 U11.12 U11.13 U11.14 U11.15 U11.16 U11.17 U11.18 U11.19 U11.20 U11.21 U11.22 U11.23 U11.24 U11.25 U11.26 U11.27 U11.28 U11.29 U11.30 U11.31 U11.32 U11.33 ZQ2.2 ZQ2.4

## Polygon pours and split planes (outlines as drawn)
GND on Top Layer "NONET_L01_P003" (solid, shelved, pour order 3): -5,-5 -5,75 125,75 125,-5
NetL1_1 on Top Layer "NONET_L01_P000" (solid, shelved, pour order 0): 112.98,26.487 114.728,24.739 114.728,18.814 110.927,18.814 110.608,19.133 110.608,25.196 111.405,25.993 111.405,26.49
NetL1_2 on Top Layer "NONET_L01_P001" (solid, shelved, pour order 1): 107.98,26.488 106.442,24.95 106.442,18.814 109.854,18.814 110.103,19.064 110.103,25.196 109.305,25.993 109.305,26.49
VCC5V5_REG on Top Layer "NONET_L01_P002" (solid, shelved, pour order 2): 109.305,26.71 108.009,26.71 107.359,26.06 100.917,26.06 99.844,26.06 99.367,26.538 99.367,28.631 100.669,29.934 105.169,29.934 105.169,29.334 105.29,29.212 107.083,29.212 109.305,26.99
VCC3V3 on POWER (split plane): 124.49,-4.49 -4.49,-4.49 -4.49,74.49 124.49,74.49
AVDD_ADC on POWER (split plane): 45.116,56.326 45.116,50.329 43.908,49.121 43.88,49.079 43.871,49.03 43.871,46.72 43.88,46.671 43.908,46.629 49.454,41.083 49.496,41.055 49.545,41.046 57.396,41.046 57.396,39.9 57.405,39.85 57.433,39.808 73.733,23.508 73.775,23.48 73.825,23.471 91.446,23.471 93.808,21.109 93.808,17.191 92.921,16.304 83.804,16.304 79.101,21.007 79.059,21.035 79.009,21.045 74.091,21.045 74.041,21.035 73.999,21.007 71.521,18.529 65.554,18.529 37.379,46.704 37.379,55.446 39.679,57.746 43.696,57.746
VCC5V0 on POWER (split plane): 115.096,51.469 115.096,26.88 109.214,20.999 109.186,20.957 109.176,20.907 109.176,9.698 107.383,7.904 98.954,7.904 98.954,20.521 106.534,28.101 106.562,28.143 106.572,28.192 106.572,51.164 108.879,53.471 113.094,53.471
DVDD_3.3V on POWER (split plane): 51.733,47.583 51.775,47.555 51.825,47.546 70.771,47.546 72.508,45.808 72.55,45.78 72.6,45.771 93.214,45.771 103.621,35.364 103.621,31.304 102.521,30.204 94.454,30.204 93.679,30.979 93.679,38.45 93.67,38.5 93.642,38.542 90.917,41.267 90.875,41.295 90.825,41.304 49.599,41.304 44.129,46.774 44.129,48.976 45.299,50.146 49.171,50.146
GND on GND (split plane): 124.49,-4.49 -4.49,-4.49 -4.49,74.49 124.49,74.49

## Other copper
POWER (plane layer: these items are gaps in the copper):
  lines w0.254: 57.525,41.175 57.525,39.9 73.825,23.6 91.5,23.6 93.937,21.163 93.937,17.137 92.975,16.175 87.25,16.175 83.75,16.175 79.009,20.916 74.091,20.916 71.575,18.4 65.5,18.4 37.25,46.65 37.25,55.5 39.625,57.875 43.75,57.875 45.245,56.38 45.245,50.275 ; 45.245,50.275 44,49.03 44,46.72 49.545,41.175 90.825,41.175 93.55,38.45 93.55,30.925 94.4,30.075 102.575,30.075 103.75,31.25 103.75,35.418 93.268,45.9 72.6,45.9 70.825,47.675 51.825,47.675 49.225,50.275 45.245,50.275 ; 98.825,7.775 98.825,20.575 106.442,28.192 106.442,51.217 108.825,53.6 113.148,53.6 115.225,51.523 115.225,26.827 109.305,20.907 109.305,9.644 107.436,7.775 98.825,7.775

## Silkscreen, mask and mechanical layers (free items; w line width, h text height)
Top Overlay:
  rectangle: 17.022,0.995 32.008,3.19
  rectangle: 17.022,3.573 32.008,5.768
  text "Riglab.xyz" at 13.49,7.319 h1.54
  text "PN" at 13.433,3.96 h1.54
  text "SN" at 13.433,1.485 h1.54
  text "Dynamic Scales WiFi 3ch Rev 0.1" at -3.321,-0.708 h1.54
  text "MADE IN RUSSIA" at 13.49,-3.469 h1.54
Bottom Overlay:
  circle w0.254: c0,0 r2.5
  circle w0.254: c0,70 r2.5
  circle w0.254: c120,0 r2.5
  circle w0.254: c120,70 r2.5
  text "STM Prog" at 60.14,10.592 h1.4
  text "NRST" at 44.279,10.26 h1.4 r90
  text "VCC3V3" at 46.665,10.26 h1.4 r90
  text "SWDIO" at 49.34,10.26 h1.4 r90
  text "SWCLK" at 52.005,10.26 h1.4 r90
  text "GND" at 54.566,10.26 h1.4 r90
1 - Board Outline:
  the board outline again, w0.254

## Dimensions
8.175,7.9 to 8.175,12.9 on Mechanical 4
8.175,22.9 to 8.175,12.9 on Mechanical 4
8.175,52.9 to 8.175,22.9 on Mechanical 4
8.175,62.9 to 8.175,52.9 on Mechanical 4
8.175,52.9 to 8.175,62.9 on Mechanical 4
8.175,62.9 to 8.175,52.9 on Mechanical 4
-5,-5 to 125,75 on Mechanical 4
-5,-5 to -5,75 on Mechanical 4